# Altium PCB PCB1.PcbDoc
Units mm, origin at the board's own origin, x right, y up, seen from the top; angles counter-clockwise.
Board outline 92.71 x 59.95 mm, 4 copper layers (Top Layer, Inner Layer Top, Inner Layer Bottom, Bottom Layer), stack 1.571 mm thick; 48 components, 33 nets, 202 pads, 802 vias.
Unrouted connection lines stored in the file: 2.
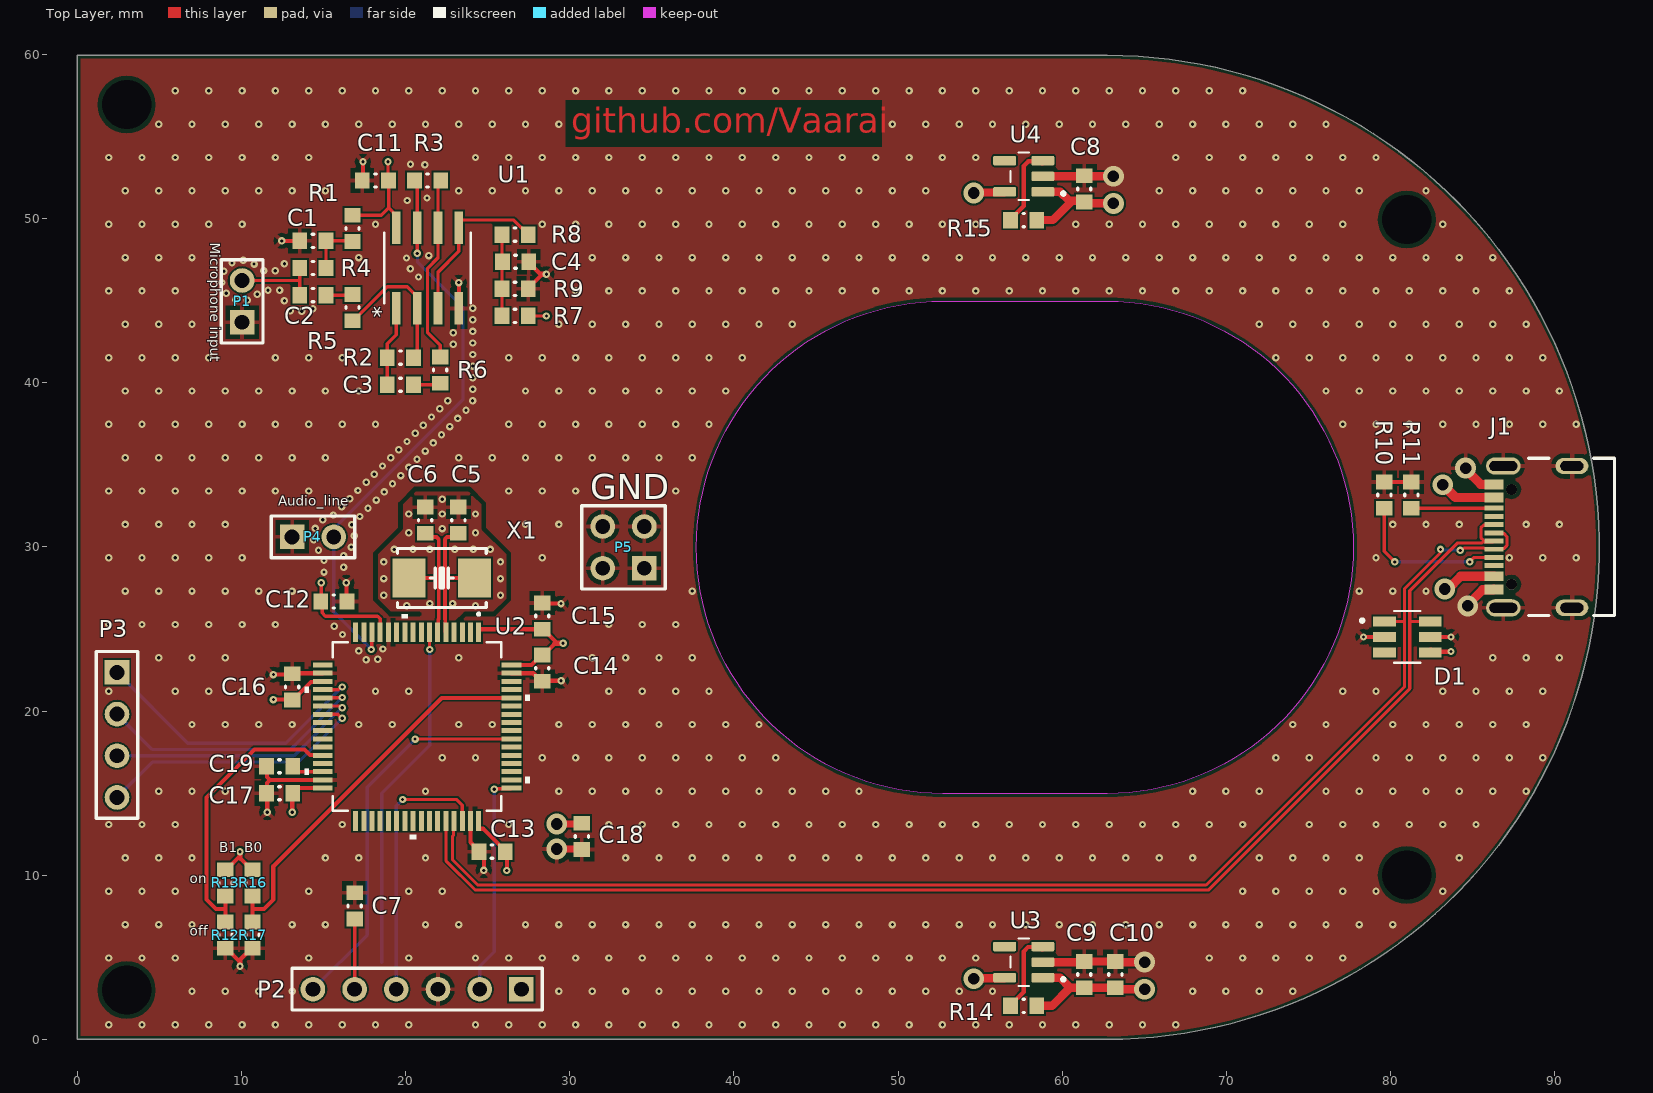
[diagram p0: Top Layer view]
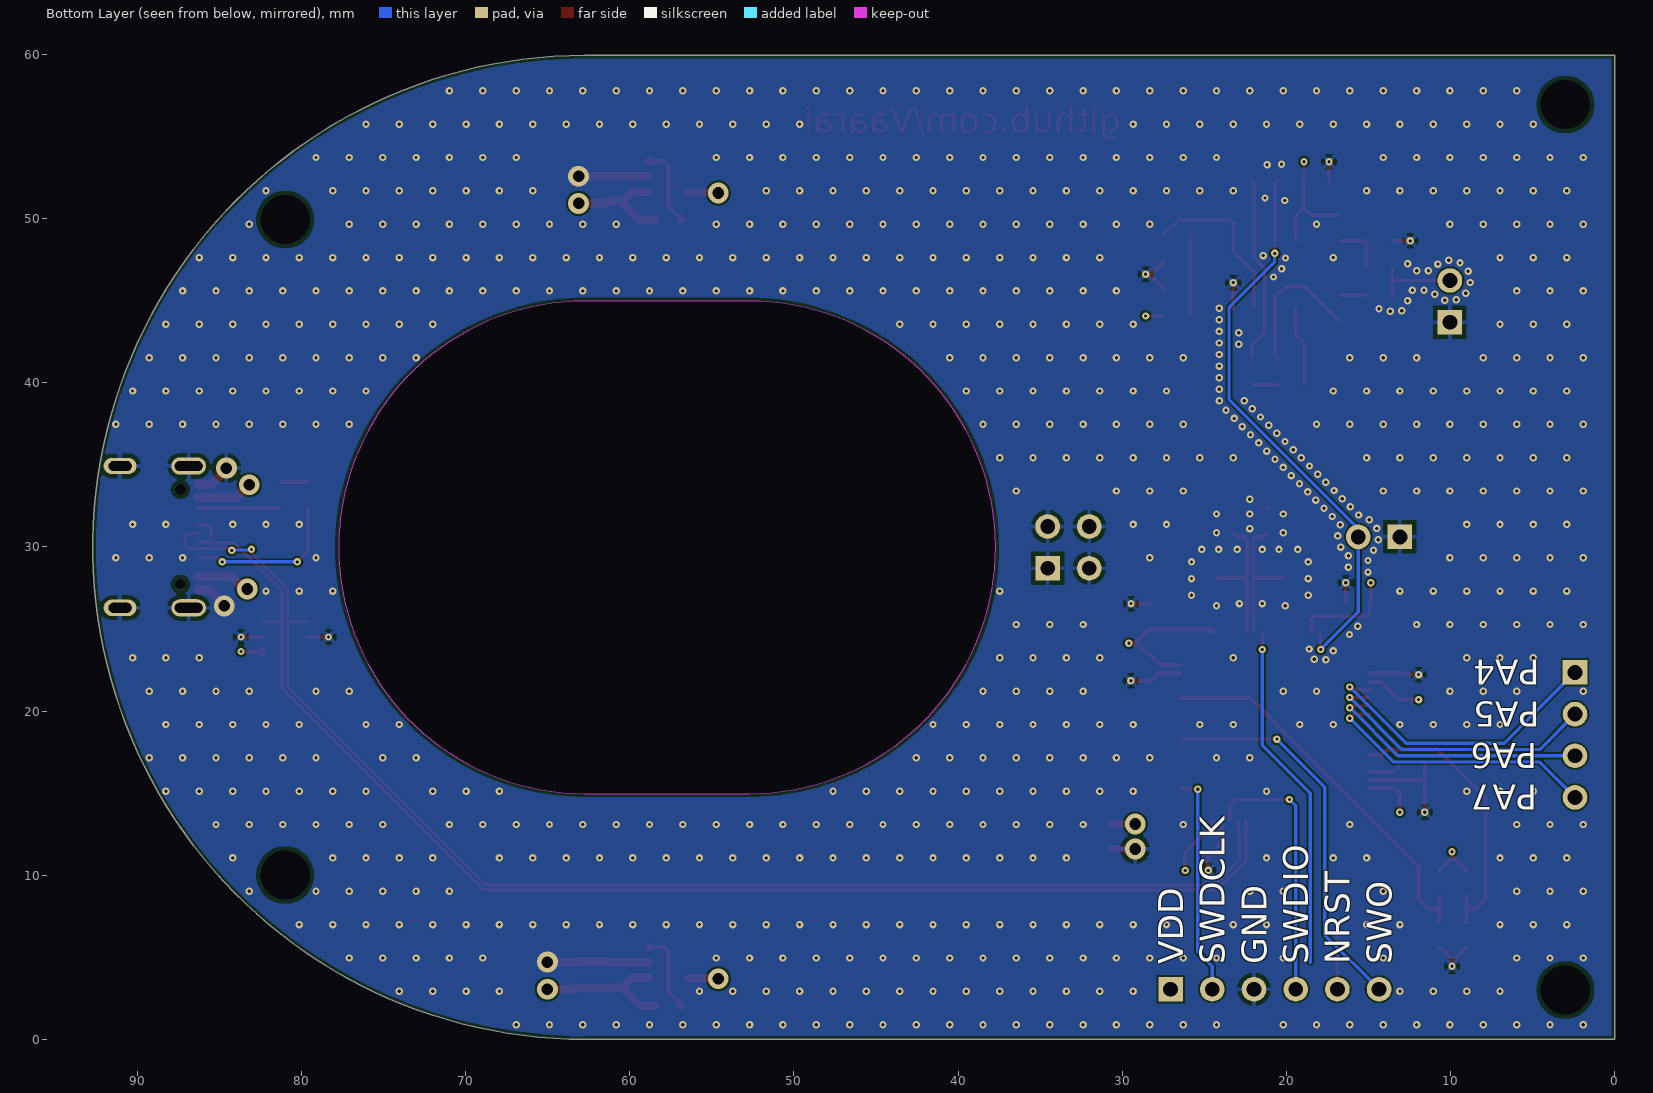
[diagram p1: Bottom Layer view, seen from below]
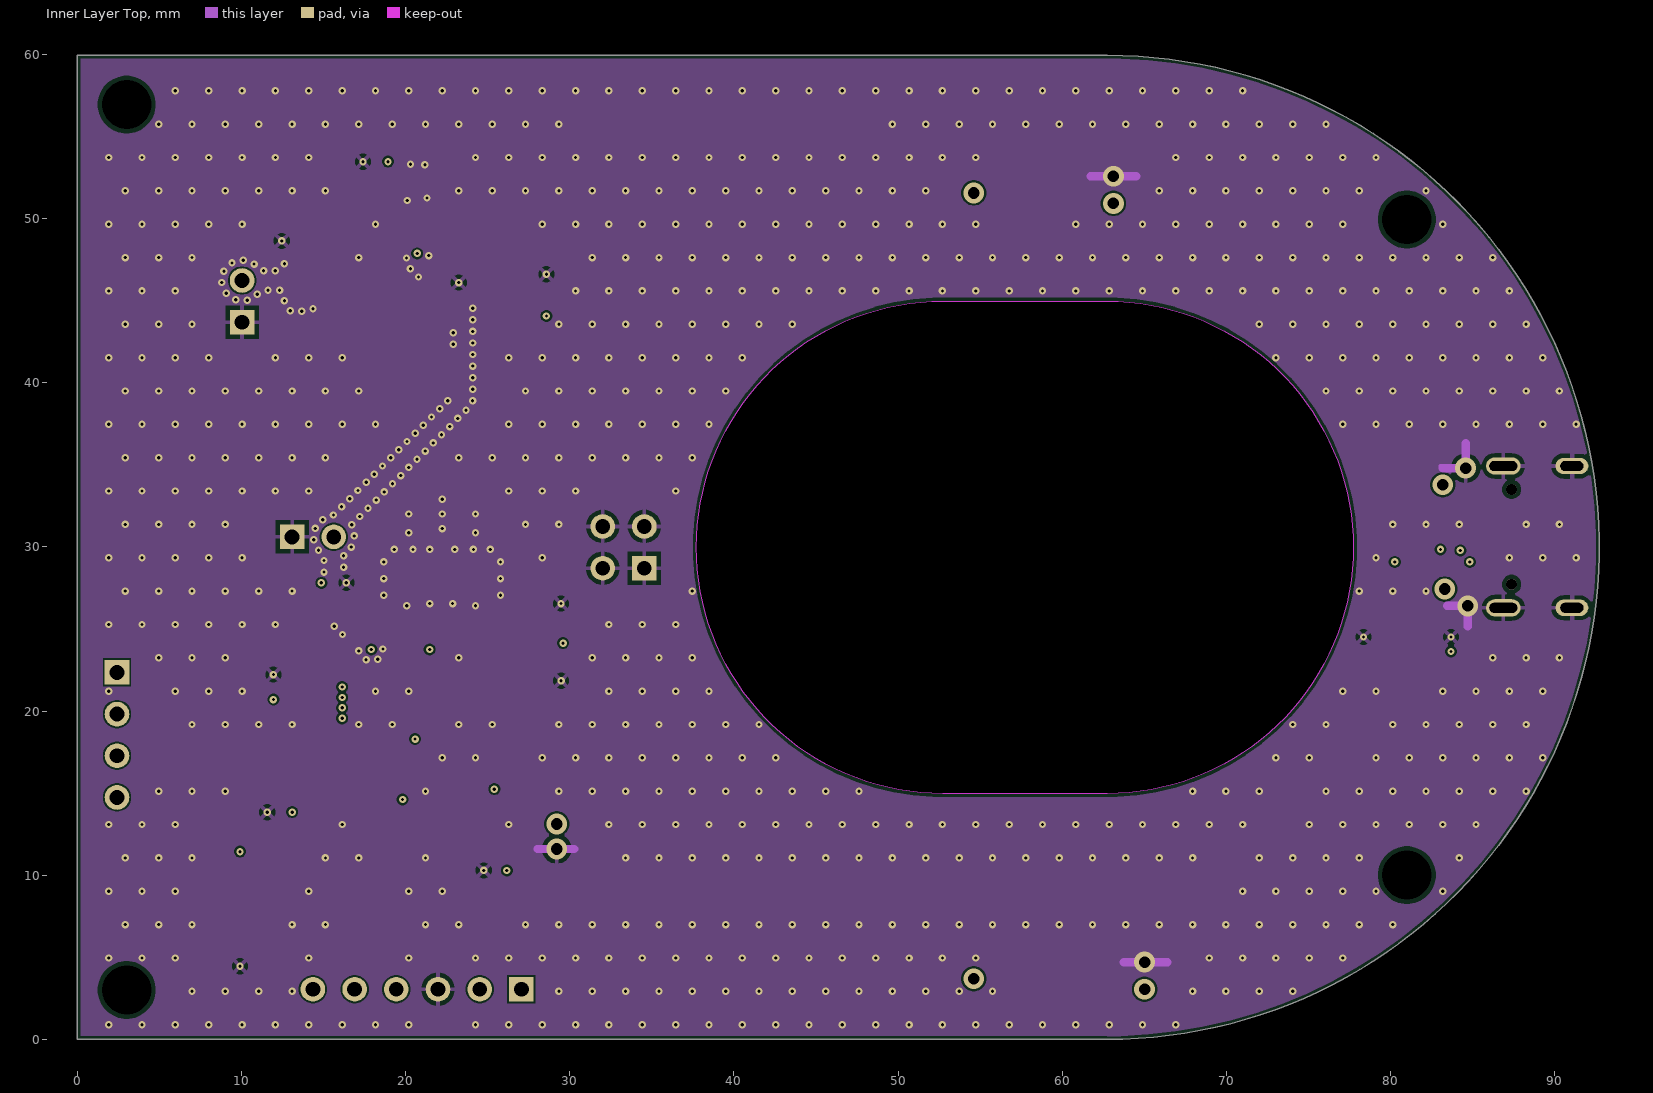
[diagram p2: Inner Layer Top]
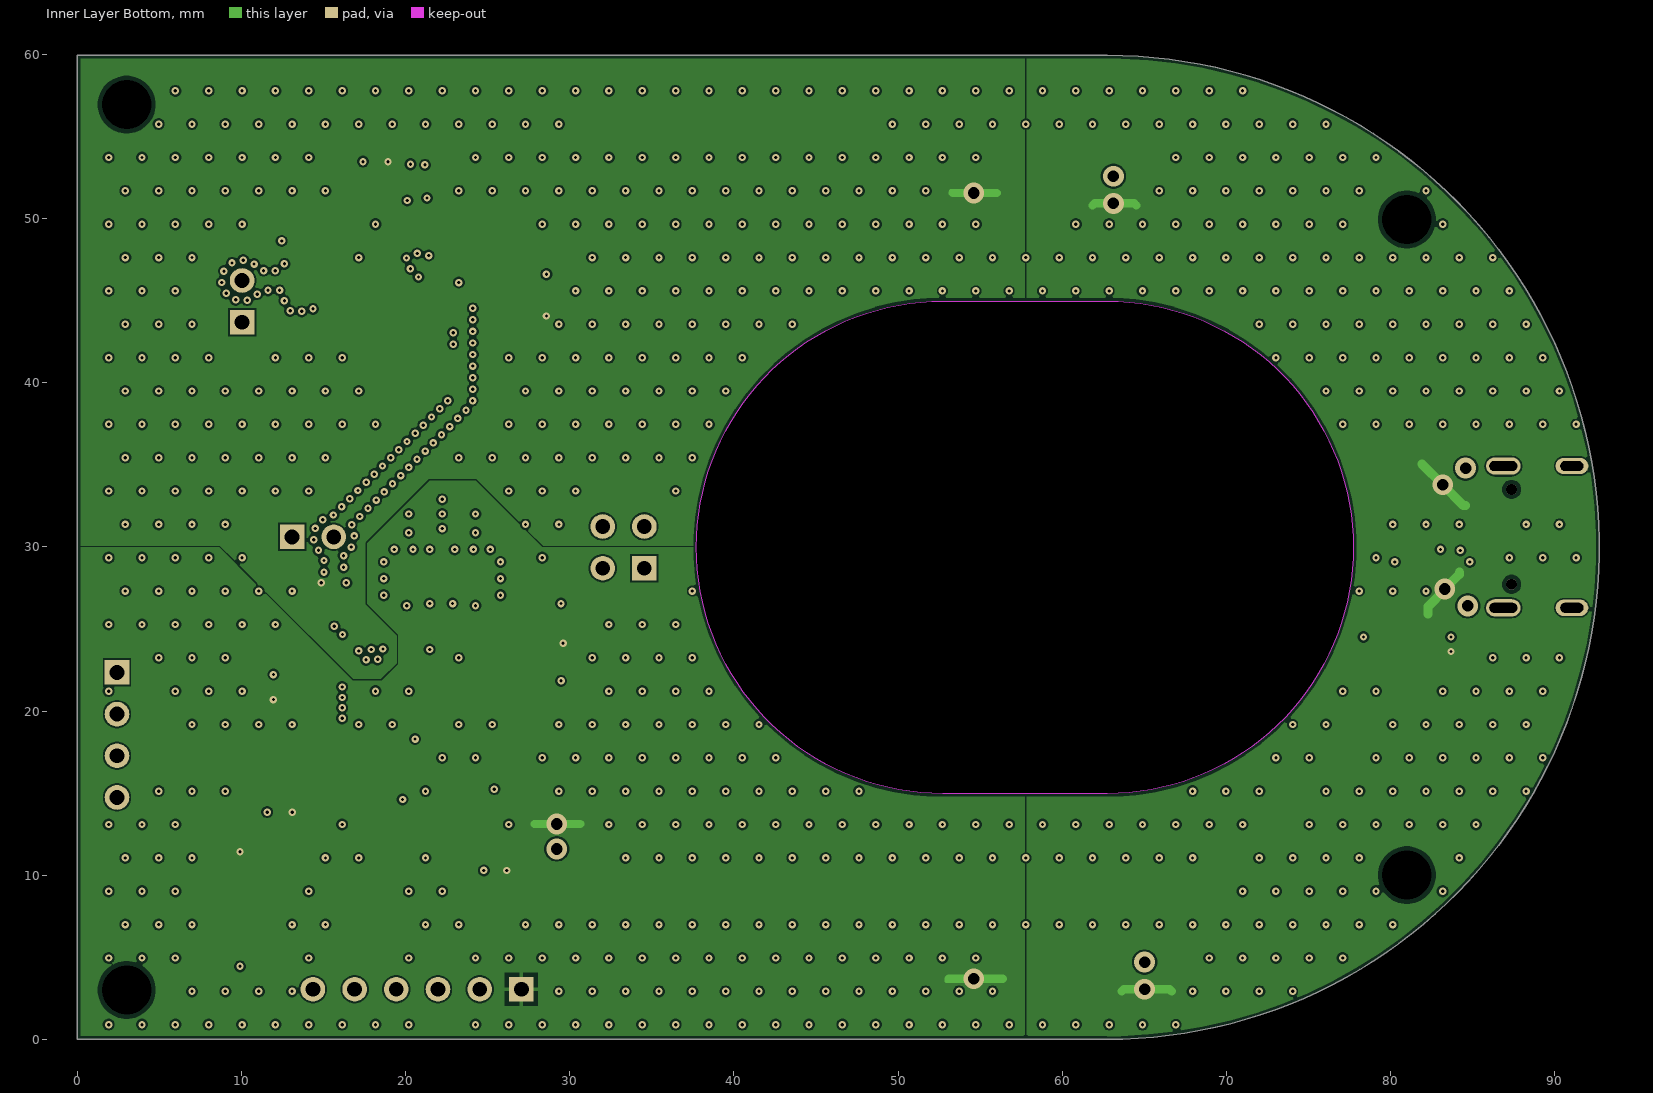
[diagram p3: Inner Layer Bottom]

## Layer stack, top to bottom
Top Solder: solder mask 0.0127, Solder Resist, Dk 3.8
Top Layer: signal copper 0.0356
Prepreg Top: prepreg 0.2, PP-022, Dk 4.6
Inner Layer Top: signal copper 0.0175
Core: dielectric 1.065, FR-4, Dk 4.6
Inner Layer Bottom: signal copper 0.0175
Prepreg Bottom: prepreg 0.2, PP-022, Dk 4.6
Bottom Layer: signal copper 0.0356
Bottom Solder: solder mask 0.0127, Solder Resist, Dk 3.8

## Board outline
0,0.001 0,59.945 62.738,59.945 cw(c62.738,29.97) 62.738,-0.006
cut-out: 52.716,14.97 cw(c52.716,29.97) 52.716,44.97 62.738,44.97 cw(c62.738,29.97) 62.738,14.97

## Design rules (kind name [scope] priority, off if disabled: settings)
BoardOutlineClearance [All] p1: gap=0.2 ignorepadtopadclearanceinfootprint=FALSE
Clearance Clearance_1 [InNamedPolygon('GND_TOP') vs InNamedPolygon('GND_OSC')] p1: gap=0.254 ignorepadtopadclearanceinfootprint=FALSE except(0: Arc-Hole Track-Hole SMDPad-Hole THPad-Hole Via-Hole Fill-Hole Poly-Hole Region-Hole Text-Hole)
Clearance [All] p2: gap=0.102 ignorepadtopadclearanceinfootprint=FALSE except(0.127: Arc-Via Track-Via SMDPad-Via THPad-Via Via-Via Via-Fill Via-Poly Via-Region Via-Text; 0.25: Arc-Hole Track-Hole SMDPad-Hole THPad-Hole Via-Hole Fill-Hole Poly-Hole Region-Hole Text-Hole)
ComponentClearance [All] p1: gap=0.102 collisioncheckmode=3 verticalgap=0.102 showdistances=TRUE
DiffPairsRouting "90 Ohms" [All] p1: maxlimit=0.127 minlimit=0.127 mostfreqgap=0.127 toplayer_minwidth=0.189 toplayer_maxwidth=0.189 toplayer_prefwidth=0.189 bottomlayer_minwidth=0.189 bottomlayer_maxwidth=0.189 bottomlayer_prefwidth=0.189 impedanceprofiledriven=TRUE impedanceprofileid={EE4570CF-732E-4289-AE26-F3C0BA716A59} impedanceprofilevalue=90.000000 maxuncoupledlength=12.7
DiffPairsRouting OSC [All] p2: maxlimit=0.254 minlimit=0.152 mostfreqgap=0.254 toplayer_maxgap=0.152 toplayer_prefgap=0.152 toplayer_minwidth=0.229 toplayer_maxwidth=0.229 toplayer_prefwidth=0.229 midlayer1_mingap=0.254 midlayer1_minwidth=0.381 midlayer1_maxwidth=0.381 midlayer1_prefwidth=0.381 midlayer2_mingap=0.254 midlayer2_minwidth=0.381 midlayer2_maxwidth=0.381 midlayer2_prefwidth=0.381 bottomlayer_maxgap=0.152 bottomlayer_prefgap=0.152 bottomlayer_minwidth=0.229 bottomlayer_maxwidth=0.229 bottomlayer_prefwidth=0.229 maxuncoupledlength=12.7
DiffPairsRouting [All] p3: maxlimit=0.102 minlimit=0.102 mostfreqgap=0.102 toplayer_minwidth=0.102 toplayer_maxwidth=1816.048 toplayer_prefwidth=0.102 midlayer1_minwidth=0.102 midlayer1_maxwidth=1816.048 midlayer1_prefwidth=0.102 midlayer2_minwidth=0.102 midlayer2_maxwidth=1816.048 midlayer2_prefwidth=0.102 bottomlayer_minwidth=0.102 bottomlayer_maxwidth=1816.048 bottomlayer_prefwidth=0.102 maxuncoupledlength=12.7
Height [All] p1: minheight=0 maxheight=1816.048 prefheight=12.7
HoleSize [All] p1: absolutevalues=TRUE maxlimit=6.3 minlimit=0.2 maxpercent=80.000 minpercent=20.000
HoleToHoleClearance [All] p1: gap=0.25 allowstackedmicrovias=FALSE
MinimumAnnularRing [All] p1: minimumring=0.076
MinimumSolderMaskSliver [All] p1: minsoldermaskwidth=0
PlaneClearance [All] p1: clearance=0.102
PlaneConnect PlaneConnectPowerPads [InPadClass('PowerPads')] p1: planeconnectstyle=Relief reliefexpansion=0.508 reliefentries=4 reliefconductorwidth=0.254 reliefairgap=0.254
PlaneConnect [All] p2: planeconnectstyle=Relief reliefexpansion=0.3 reliefentries=4 reliefconductorwidth=0.102 reliefairgap=0.102
PolygonConnect PolygonConnectPowerPads [All vs (InPadClass('PowerPads'))] p1: connectstyle=Relief reliefconductorwidth=0.254 reliefentries=4 polygonreliefangle="90 Angle" airgapwidth=0.254
PolygonConnect [All] p2: thpad.connectstyle=Relief thpad.reliefconductorwidth=0.102 thpad.reliefentries=4 thpad.polygonreliefangle="90 Angle" thpad.airgapwidth=0.102 smdpad.connectstyle=Relief smdpad.reliefconductorwidth=0.102 smdpad.reliefentries=4 smdpad.polygonreliefangle="90 Angle" smdpad.airgapwidth=0.102 via.connectstyle=Direct via.reliefconductorwidth=0.127 via.reliefentries=4 via.polygonreliefangle="45 Angle" via.airgapwidth=0.127
RoutingVias [All] p1: holewidth=0.2 width=0.45 viastyle="Through Hole" minholewidth=0.2 minwidth=0.45 maxholewidth=6.3 maxwidth=6.55
SilkToSilkClearance [All] p1: silktosilkclearance=0
SilkToSolderMaskClearance [IsPad] p1: minsilkscreentomaskgap=0.102 clearancetoexposedcopper=TRUE
SolderMaskExpansion [All] p1: expansion=0.075 istentingtop=FALSE
SolderMaskExpansion SolderMaskExpansion_vias [IsVia] p2: expansion=0.075 istentingtop=TRUE
Width GND [InNet('GND')] p1: maxlimit=0.762 minlimit=0.203 preferedwidth=0.254 midlayer1_minwidth=0.254 midlayer1_maxwidth=0.254 midlayer2_minwidth=0.254 midlayer2_maxwidth=0.254 minimp=50.000000 maximp=50.000000 favimp=50.000000
Width VDD [InNet('VDD')] p2: maxlimit=0.762 minlimit=0.203 preferedwidth=0.254 midlayer1_minwidth=0.254 midlayer1_maxwidth=0.254 midlayer2_minwidth=0.254 midlayer2_maxwidth=0.254 minimp=50.000000 maximp=50.000000 favimp=50.000000
Width [All] p3: maxlimit=1816.048 minlimit=0.102 preferedwidth=0.203 midlayer1_prefwidth=0.102 midlayer2_prefwidth=0.102 minimp=50.000000 maximp=50.000000 favimp=50.000000
20 further rules are at their usual default settings.

## Classes and differential pairs
net class OSC: OSC_IN OSC_OUT
net class "90 Ohms": USB_N USB_P
component class Sheet1: C1 C2 C3 C4 C5 C6 C7 C8 C9 C10 C11 C12 C13 C14 C15 C16 C17 C18 C19 D1 J1 P1 P2 R1 R2 R3 R4 R5 R6 R7 R8 R9 R10 R11 R17 U2 U3 U4 X1
differential pair USB: +USB_P -USB_N

## Components (designator, comment, footprint, x,y, rotation, side; value= is the part's Value field where it differs from the comment)
C1 "4.7uF" 0603C 14.351,48.642 r180 top
C2 "1uF" 0603C 14.351,45.34 r0 top
C3 "1uF" 0603C 19.685,39.879 r0 top
C4 "4.7uF" 0603C 26.695,47.372 r0 top
C5 "20pF" 0603C 23.217,31.624 r90 top
C6 "20pF" 0603C 21.185,31.624 r90 top
C7 "100nF" 0603C 16.891,8.129 r90 top
C8 "100nF" 0603C 61.341,51.817 r90 top
C9 "100nF" 0603C 61.341,3.938 r90 top
C10 "4.7uF" 0603C 63.246,3.938 r90 top
C11 "100nF" 0603C 18.161,52.325 r180 top
C12 "100nF" 0603C 15.621,26.671 r0 top
C13 "100nF" 0603C 25.273,11.431 r180 top
C14 "100nF" 0603C 28.321,22.607 r270 top
C15 "100nF" 0603C 28.321,25.782 r90 top
C16 "100nF" 0603C 13.081,21.464 r90 top
C17 "100nF" 0603C 12.319,14.987 r180 top
C18 "4.7uF" 0603C 30.734,12.358 r270 top
C19 "2.2uF" 0603C 12.319,16.638 r180 top
D1 "ESDA6V1BC6" IC_IC-DP_SOT23-6L 81.026,24.512 r0 top
J1 "USB4105-GF-A" GCT_USB4105-GF-A 91.059,30.606 r90 top
P1 "Microphone input" HDR1X2 10.033,43.689 r90 top
P2 "JTAG" HDR1X6 27.051,3.049 r180 top
P3 "GPIO" HDR1X4 2.413,22.353 r270 top
P4 "Audio_line" HDR1X2 13.081,30.608 r0 top
P5 "GND" HDR2X2 34.544,28.703 r90 top
R1 "1K" 0603R 16.764,49.404 r90 top
R2 "100K" 0603R 19.685,41.53 r180 top
R3 "100K" 0603R 21.336,52.325 r180 top
R4 "2.2K" 0603R 14.351,46.991 r0 top
R5 "10K" 0603R 16.764,44.578 r270 top
R6 "10K" 0603R 22.098,40.768 r90 top
R7 "100K" 0603R 26.67,44.07 r0 top
R8 "33K" 0603R 26.67,49.023 r0 top
R9 "100K" 0603R 26.67,45.721 r180 top
R10 "5.1K" 0603R 79.629,33.148 r270 top value=100K
R11 "5.1K" 0603R 81.28,33.148 r90 top value=100K
R12 "10K" 0603R 9.017,6.351 r90 top
R13 "10K" 0603R 9.017,9.526 r270 top
R14 "5.1K" 0603R 57.658,2.033 r180 top value=100K
R15 "5.1K" 0603R 57.658,49.912 r180 top value=100K
R16 "10K" 0603R 10.669,9.526 r270 top
R17 "10K" 0603R 10.669,6.351 r90 top
U1 "TS972IDT" SO-8_STM 21.336,46.991 r90 top
U2 "STM32F446RET6" LQFP64-10x10mm 20.701,19.051 r270 top
U3 "MIC5504-3.3YM5_TR" SOT95P280X145-5N 57.658,4.7 r180 top
U4 "MIC5504-3.3YM5_TR" SOT95P280X145-5N 57.658,52.579 r180 top
X1 "NX5032GA" 2-SMD-5X3 22.201,28.103 r180 top

## Footprints (in the part's own frame and the unit in brackets; to place one, negate y for a bottom-side part, rotate by r counter-clockwise, add the part's x,y. Pads: shape width x height; smd on the part's side, far side on the other; paste and mask are expansions set on the pad)
2-SMD-5X3 [mm]
  rect 2x2.4 smd: 1(-2,0) 2(2,0)
  silkscreen extent -2.7,-1.8 2.7,1.8
0603C [mm] "Chip Capacitor, Body 1.6x0.8mm, Height 1.0mm, IPC Medium Density"
  rect 0.9x1 smd: 1(-0.8,0) 2(0.8,0)
  silkscreen extent -0.05,-0.4 0.05,0.4, body extent -0.87,-0.48 0.88,0.47, height 1
0603R [mm] "Chip Resistor, Body 1.6x0.8mm, IPC Medium Density"
  rect 0.9x1 smd: 1(-0.8,0) 2(0.8,0)
  silkscreen extent -0.05,-0.4 0.05,0.4, body extent -0.85,-0.47 0.85,0.47, height 0.6
GCT_USB4105-GF-A [mm]
  rect 0.6x1.15 smd: A1_B12(-3.2,4.755) A4_B9(-2.4,4.755) B1_A12(3.2,4.755) B4_A9(2.4,4.755)
  rect 0.3x1.15 smd: A5(-1.25,4.755) A6(-0.25,4.755) A7(0.25,4.755) A8(1.25,4.755) B5(1.75,4.755) B6(0.75,4.755) B7(-0.75,4.755) B8(-1.75,4.755)
  oval 1.05x2.1 hole 0.6 slot 1.7 at 90 deg: S1(-4.32,4.18) S4(4.32,4.18)
  oval 1x2 hole 0.6 slot 1.4 at 90 deg: S2(-4.32,0) S3(4.32,0)
  round 0.65 hole 0.65 unplated: ""(-2.89,3.68) ""(2.89,3.68)
  silkscreen extent -4.79,-2.6 4.79,2.65, body extent -4.79,-3.86 4.79,3.86, height 3.31
HDR1X2 [mm] "Connector; Header; 2 Position"
  rect 1.5x1.5 hole 0.9: 1(0,0)
  round 1.5 hole 0.9: 2(2.54,0)
  silkscreen extent -1.27,-1.27 3.81,1.27
HDR1X4 [mm] "Connector; Header; 4 Position"
  rect 1.5x1.5 hole 0.9: 1(0,0)
  round 1.5 hole 0.9: 2(2.54,0) 3(5.08,0) 4(7.62,0)
  silkscreen extent -1.27,-1.27 8.89,1.27
HDR1X6 [mm] "Connector; Header; 6 Position"
  rect 1.5x1.5 hole 0.9: 1(0,0)
  round 1.5 hole 0.9: 2(2.54,0) 3(5.08,0) 4(7.62,0) 5(10.16,0) 6(12.7,0)
  silkscreen extent -1.27,-1.27 13.97,1.27
HDR2X2 [mm] "Connector; Header; 2x2 Position"
  rect 1.5x1.5 hole 0.9: 1(0,0)
  round 1.5 hole 0.9: 2(0,2.54) 3(2.54,0) 4(2.54,2.54)
  silkscreen extent -1.27,-1.27 3.81,3.81
IC_IC-DP_SOT23-6L [mm]
  rect 1.375x0.6 smd: 1(-1.389,0.95) 2(-1.389,0) 3(-1.389,-0.95) 4(1.389,-0.95) 5(1.389,0) 6(1.389,0.95)
  silkscreen extent -2.85,-1.57 0.8,1.57
LQFP64-10x10mm [mil]
  rect 47x12 smd paste+0 mask+0: 1(-226.38,147.64) 2(-226.38,127.95) 3(-226.38,108.27) 4(-226.38,88.58) 5(-226.38,68.9) 6(-226.38,49.21) 7(-226.38,29.53) 8(-226.38,9.84) 9(-226.38,-9.84) 10(-226.38,-29.53) 11(-226.38,-49.21) 12(-226.38,-68.9) 13(-226.38,-88.58) 14(-226.38,-108.27) 15(-226.38,-127.95) 16(-226.38,-147.64) 33(226.38,-147.64) 34(226.38,-127.95) 35(226.38,-108.27) 36(226.38,-88.58) 37(226.38,-68.9) 38(226.38,-49.21) 39(226.38,-29.53) 40(226.38,-9.84) 41(226.38,9.84) 42(226.38,29.53) 43(226.38,49.21) 44(226.38,68.9) 45(226.38,88.58) 46(226.38,108.27) 47(226.38,127.95) 48(226.38,147.64)
  rect 12x47 smd paste+0 mask+0: 17(-147.64,-226.38) 18(-127.95,-226.38) 19(-108.27,-226.38) 20(-88.58,-226.38) 21(-68.9,-226.38) 22(-49.21,-226.38) 23(-29.53,-226.38) 24(-9.84,-226.38) 25(9.84,-226.38) 26(29.53,-226.38) 27(49.21,-226.38) 28(68.9,-226.38) 29(88.58,-226.38) 30(108.27,-226.38) 31(127.95,-226.38) 32(147.64,-226.38) 49(147.64,226.38) 50(127.95,226.38) 51(108.27,226.38) 52(88.58,226.38) 53(68.9,226.38) 54(49.21,226.38) 55(29.53,226.38) 56(9.84,226.38) 57(-9.84,226.38) 58(-29.53,226.38) 59(-49.21,226.38) 60(-68.9,226.38) 61(-88.58,226.38) 62(-108.27,226.38) 63(-127.95,226.38) 64(-147.64,226.38)
  silkscreen extent -273,-270 270,270, body extent -236,-236 236,236, height 63
SO-8_STM [mil]
  rect 78x21 smd paste+0 mask+0: 1(-97,75) 2(-97,25) 3(-97,-25) 4(-97,-75) 5(97,-75) 6(97,-25) 7(97,25) 8(97,75)
  silkscreen extent -84,-104 84,104, body extent -122,-99 122,99, height 69
SOT95P280X145-5N [mm]
  rrect25% 1.39x0.58 smd: 1(-1.165,0.95) 2(-1.165,0) 3(-1.165,-0.95) 4(1.165,-0.95) 5(1.165,0.95)
  silkscreen extent -2.51,-1.45 0.8,1.45, body extent 15,-1.1 17.9,0, height 25.4

## Part data
C1 C2 C3 C4 C5 C6 C7 C8 C9 C10 C11 C12 C13 C14 C15 C16 C17 C18 C19: library part CAP, "Capacitor"
D1: "4-line ESD protection", Manuf_1=STM, Manuf_Part_1=ESDA5V3L, Distrib=ST, ECCN_US/EU=EAR99/NEC, Order=ESDA5V3L, Ordered by=STM, Provided=ST, Ref St=9179034
J1: "USB-C (USB TYPE-C) USB 2.0 Receptacle Connector 24 (16+8 Dummy) Position Surface Mount, Right Angle; Through Hole", Package=None, Availability=Warning, Check_prices=https://www.snapeda.com/parts/USB4105-GF-A/Global%20Connector%20Technology/view-part/4423780/?ref=eda, MF=GCT, MP=USB4105-GF-A, Price=None, Purchase-URL=https://pricing.snapeda.com/search/part/USB4105-GF-A/?ref=eda, SnapEDA_Link=https://www.snapeda.com/parts/USB4105-GF-A/Global%20Connector%20Technology/view-part/4423780/?ref=snap
P1 P4: library part "Header 2", "Header, 2-Pin", LatestRevisionDate=17-Jul-2002, LatestRevisionNote="Re-released for DXP Platform.", Publisher="Altium Limited"
P2: library part "Header 6", "Header, 6-Pin", LatestRevisionDate=17-Jul-2002, LatestRevisionNote="Re-released for DXP Platform.", Publisher="Altium Limited"
P3: library part "Header 4", "Header, 4-Pin", LatestRevisionDate=17-Jul-2002, LatestRevisionNote="Re-released for DXP Platform.", Publisher="Altium Limited"
P5: library part "Header 2X2", "Header, 2-Pin, Dual row", LatestRevisionDate=17-Jul-2002, LatestRevisionNote="Re-released for DXP Platform.", Publisher="Altium Limited"
R1 R2 R3 R4 R5 R6 R7 R8 R9 R10 R11 R12 R13 R14 R15 R16 R17: library part Res1, "Resistor", Published=8-Jun-2000, Publisher="Altium Limited", Revision="July-2002: Re-released for DXP Platform."
U1 U2: "No Description Available", Mfr_Name=STMicroelectronics, Copyright="Copyright (C) 2021 Ultra Librarian. All rights reserved.", RefDes=RefDes, Type=DEV
  U1: Manufacturer_Part_Number=TS972IDT
  U2: Manufacturer_Part_Number=STM32F446RET6
U3 U4: "Linear Voltage Regulator IC 1 Output 300mA SOT-23-5", Package="SOT-23 Microchip", Availability=Unavailable, Check_prices=https://www.snapeda.com/parts/MIC5504-3.3YM5%20TR/Microchip/view-part/423262/?ref=eda, MF=Microchip, MP="MIC5504-3.3YM5 TR", Price=None, SnapEDA_Link=https://www.snapeda.com/parts/MIC5504-3.3YM5%20TR/Microchip/view-part/423262/?ref=snap
X1: "16MHz Â±50ppm Crystal 8pF 120 Ohms 2-SMD, No Lead", Package="SMD-2 NDK America,", Availability=Unavailable, MF="NDK America,", MP=NX5032GA, Price=None, SnapEDA_Link=https://www.snapeda.com/parts/NX5032GA/NDK%20America%2C%20Inc./view-part/511653/?ref=snap

## Free pads (board coordinates)
  round 0 hole 3 unplated: 3(3,3) 3(3,56.945) 3(81,10) 3(81,49.945)

## Via types
v1: diameter 0.45/0.45/0.45/0.45 (per signal layer), hole 0.2, Top Layer to Bottom Layer, tented both sides, 740 vias
v2: diameter 0.45, hole 0.2, Top Layer to Bottom Layer, tented both sides, 50 vias
v3: diameter 1.27/1.27/1.27/1.27 (per signal layer), hole 0.711, Top Layer to Bottom Layer, 10 vias
v4: diameter 1.27, hole 0.711, Top Layer to Bottom Layer, 2 vias

## Nets (pads, with @x,y where several pads share a name; then routed paths per layer and width w, separated by ;. In a path a pad name is that pad's centre, name@x,y a point inside that pad or via, vN(x,y) a via of type N, cw(c..) or ccw(c..) an arc to the next point about the centre after c; other vN are vias at no path point)
AOP1_+: R8.2 U1.3 U1.5 | length 10.4
  Top Layer w0.203: U1.3 21.971,46.737 23.241,48.007 U1.5 23.241,49.747 23.406,49.912 26.581,49.912 27.072,49.421 27.122,49.421 27.47,49.073 R8.2
AOP1_-: R2.1 R5.2 U1.2 | length 8.9
  Top Layer w0.203: R5.2 16.814,43.778 18.884,45.848 20.104,45.848 20.701,45.251 U1.2 20.701,41.746 R2.1
AOP1_OUT: C3.1 R2.2 U1.1 | length 4.9
  Top Layer w0.203: C3.1 18.885,42.378 19.431,42.924 U1.1
AOP2_-: R3.1 R6.2 U1.6 | length 11.4
  Top Layer w0.203: R6.2 22.098,42.292 21.336,43.054 21.336,46.991 21.971,47.626 U1.6 21.971,52.16 R3.1
AOP2_OUT: P4.2 R3.2 U1.7 U2.14 | length 35
  Top Layer w0.203: v2(17.907,23.75) 17.929,23.772 U2.14@17.929,24.779 ; R3.2 20.701,52.16 U1.7 v2(20.701,47.88)
  Bottom Layer w0.203: v2(17.907,23.75) 15.621,26.036 15.621,31.116 23.495,38.99 23.495,44.578 20.723,47.35 20.723,47.858 v2(20.701,47.88)
AVDD: C11.1 C12.1 R1.2 R7.2 U1.8 U2.13 U4.5 | length 19.7
  Top Layer w0.203: v1(14.865,27.808) 14.865,26.715 C12.1 14.91,26.582 14.91,25.985 15.113,25.782 18.288,25.782 18.451,25.619 U2.13 ; R1.2 18.516,50.204 18.961,50.648 ; v1(18.923,53.468) 18.923,52.363 C11.1 18.961,50.648 ; U1.8@19.266,48.642 19.431,48.807 U1.8 19.431,50.178 18.961,50.648 ; R7.2 v1(28.575,44.07) ; v3(54.61,51.563) v3@54.643,51.596 ; U4.5@56.46,51.596 U4.5
  Top Layer w0.508: v3@54.643,51.596 U4.5@56.46,51.596
  Inner Layer Bottom w0.203: 53.213,51.69 53.34,51.563
  Inner Layer Bottom w0.508: 53.34,51.563 v3(54.61,51.563) 56.007,51.563
BOOT0: R16.2 R17.2 U2.60 | length 23.9
  Top Layer w0.254: R17.2 10.669,7.938 ; R16.2 10.669,7.938 ; U2.60 22.197,20.801 11.938,10.542 11.938,8.51 11.367,7.938 10.669,7.938
BOOT1: R12.2 R13.2 U2.28 | length 17.6
  Top Layer w0.254: R12.2 9.017,7.938 ; R13.2 9.017,7.938 ; U2.28 14.926,17.326 14.171,17.326 13.843,17.654 10.795,17.654 7.874,14.733 7.874,8.51 8.446,7.938 9.017,7.938
CC1: J1.A5 R10.2 | length 9.7
  Top Layer w0.203: R10.2 79.629,29.719 v2(80.264,29.084) ; v2(84.836,29.084) 85.108,29.356 J1.A5
  Bottom Layer w0.203: v2(80.264,29.084) v2(84.836,29.084)
CC2: J1.B5 R11.1 | length 5
  Top Layer w0.203: R11.1 R11.1@81.288,32.356 ; R11.1@81.28,32.356 R11.1@81.288,32.356 ; J1.B5 R11.1@81.288,32.356
GND: C1.2 C4.2 C5.2 C6.2 C7.2 C8.2 C9.2 C10.2 C11.2 C12.2 C13.2 C14.2 C15.2 C16.2 C17.2 C18.2 C19.2 D1.2 D1.5 J1.A1_B12 J1.B1_A12 J1.S1 J1.S2 J1.S3 J1.S4 P1.1 P2.3 P4.1 P5.1 P5.2 P5.3 P5.4 R9.1 R10.1 R11.2 R12.1 R17.1 U1.4 U2.12 U2.18 U2.31 U2.47 U2.63 U3.2 U4.2 | length 61.7
  Top Layer w0.254: R12.1 9.067,5.551 9.868,4.749 9.868,4.483 v2(9.906,4.446) 9.944,4.483 9.944,4.875 10.619,5.551 R17.1 ; C19.2 11.557,16.6 11.557,15.98 11.736,15.801 ; v2(11.563,13.838) 11.563,14.943 C17.2 11.557,15.025 11.557,15.622 11.736,15.801 ; v2(11.944,22.22) C16.2@13.037,22.22 ; v2(12.446,48.642) C1.2 ; C16.2 13.118,22.301 U2.18 ; U2.31 11.736,15.801 ; v2(16.389,27.808) 16.389,26.653 16.411,26.631 16.411,26.661 C12.2 C12.2@16.471,26.621 ; C11.2 17.399,52.363 v2(17.399,53.468) ; C6.2@21.147,32.386 C6.2 ; U1.4 v2(23.241,46.102) ; U2.47 23.951,12.003 24.473,11.481 C13.2 ; v2(24.765,10.288) C13.2@24.765,11.139 ; U2.63 27.777,22.301 C14.2@28.321,21.757 ; R9.1 27.47,45.771 28.272,46.572 28.537,46.572 v2(28.575,46.61) 28.537,46.647 28.17,46.647 27.495,47.322 C4.2 ; C15.2@28.309,26.544 v2(29.464,26.544) ; C14.2 28.353,21.839 v2(29.47,21.839) ; C18.2@30.696,11.596 C18.2 ; v2(78.359,24.512) D1.2 ; R10.1 R11.2 ; D1.5 v2(83.693,24.512) ; v4@84.582,34.716 v4(84.582,34.799) ; J1.A1_B12@86.291,27.419 J1.A1_B12
  Top Layer w0.406: v4(29.21,11.596) C18.2@30.696,11.596
  Top Layer w0.508: U3.2 61.303,4.7 C9.2 C10.2 ; U4.2 61.303,52.579 C8.2 61.379,52.579 v3(63.119,52.579) ; C10.2@63.284,4.7 v3(65.024,4.7)
  Top Layer w0.559: v4@84.582,34.716 85.493,33.806 J1.B1_A12 ; v3(84.71,26.404) 84.71,26.479 85.616,27.385 86.256,27.385 J1.A1_B12@86.291,27.419
  Inner Layer Top w0.254: 27.94,11.685 28.029,11.596 ; 30.264,11.596 30.353,11.685 ; 83.058,34.926 83.185,34.799 ; 83.439,26.417 83.451,26.404
  Inner Layer Top w0.508: 28.029,11.596 v4(29.21,11.596) 30.264,11.596 ; 61.722,52.579 v3(63.119,52.579) 64.516,52.579 ; 63.754,4.7 v3(65.024,4.7) 66.421,4.7 ; 83.185,34.799 v4(84.582,34.799) 84.582,36.323 ; 83.451,26.404 v3(84.71,26.404) 84.71,25.148
  other v1: 1.905,0.89 3.937,0.89 5.969,0.89 8.001,0.89 10.033,0.89 12.065,0.89 14.097,0.89 16.129,0.89 18.161,0.89 20.193,0.89 24.257,0.89 26.289,0.89 28.321,0.89 30.353,0.89 32.385,0.89 34.417,0.89 36.449,0.89 38.481,0.89 40.513,0.89 42.545,0.89 44.577,0.89 46.609,0.89 48.641,0.89 50.673,0.89 52.705,0.89 54.737,0.89 56.769,0.89 58.801,0.89 60.833,0.89 62.865,0.89 64.897,0.89 66.929,0.89 6.985,2.922 9.017,2.922 11.049,2.922 13.081,2.922 29.337,2.922 31.369,2.922 33.401,2.922 35.433,2.922 37.465,2.922 39.497,2.922 41.529,2.922 43.561,2.922 45.593,2.922 47.625,2.922 49.657,2.922 51.689,2.922 53.721,2.922 55.753,2.922 67.945,2.922 69.977,2.922 72.009,2.922 74.041,2.922 1.905,4.954 3.937,4.954 5.969,4.954 14.097,4.954 20.193,4.954 24.257,4.954 26.289,4.954 28.321,4.954 30.353,4.954 32.385,4.954 34.417,4.954 36.449,4.954 38.481,4.954 40.513,4.954 42.545,4.954 44.577,4.954 46.609,4.954 48.641,4.954 50.673,4.954 52.705,4.954 54.737,4.954 68.961,4.954 70.993,4.954 73.025,4.954 75.057,4.954 77.089,4.954 2.921,6.986 4.953,6.986 6.985,6.986 13.081,6.986 15.113,6.986 21.209,6.986 23.241,6.986 27.305,6.986 29.337,6.986 31.369,6.986 33.401,6.986 35.433,6.986 37.465,6.986 39.497,6.986 41.529,6.986 43.561,6.986 45.593,6.986 47.625,6.986 49.657,6.986 51.689,6.986 53.721,6.986 55.753,6.986 57.785,6.986 59.817,6.986 61.849,6.986 63.881,6.986 65.913,6.986 67.945,6.986 69.977,6.986 72.009,6.986 74.041,6.986 76.073,6.986 78.105,6.986 80.137,6.986 1.905,9.018 3.937,9.018 5.969,9.018 14.097,9.018 20.193,9.018 22.225,9.018 70.993,9.018 73.025,9.018 75.057,9.018 77.089,9.018 79.121,9.018 83.185,9.018 2.921,11.05 4.953,11.05 6.985,11.05 15.113,11.05 17.145,11.05 21.209,11.05 33.401,11.05 35.433,11.05 37.465,11.05 39.497,11.05 41.529,11.05 43.561,11.05 45.593,11.05 47.625,11.05 49.657,11.05 51.689,11.05 53.721,11.05 55.753,11.05 57.785,11.05 59.817,11.05 61.849,11.05 63.881,11.05 65.913,11.05 67.945,11.05 72.009,11.05 74.041,11.05 76.073,11.05 78.105,11.05 84.201,11.05 1.905,13.082 3.937,13.082 5.969,13.082 16.129,13.082 26.289,13.082 32.385,13.082 34.417,13.082 36.449,13.082 38.481,13.082 40.513,13.082 42.545,13.082 44.577,13.082 46.609,13.082 48.641,13.082 50.673,13.082 52.705,13.082 54.737,13.082 56.769,13.082 58.801,13.082 60.833,13.082 62.865,13.082 64.897,13.082 66.929,13.082 68.961,13.082 70.993,13.082 75.057,13.082 77.089,13.082 79.121,13.082 81.153,13.082 83.185,13.082 85.217,13.082 4.953,15.114 6.985,15.114 9.017,15.114 21.209,15.114 29.337,15.114 31.369,15.114 33.401,15.114 35.433,15.114 37.465,15.114 39.497,15.114 41.529,15.114 43.561,15.114 45.593,15.114 47.625,15.114 67.945,15.114 69.977,15.114 72.009,15.114 76.073,15.114 78.105,15.114 80.137,15.114 82.169,15.114 84.201,15.114 86.233,15.114 88.265,15.114 22.225,17.146 24.257,17.146 28.321,17.146 30.353,17.146 32.385,17.146 34.417,17.146 36.449,17.146 38.481,17.146 40.513,17.146 42.545,17.146 73.025,17.146 75.057,17.146 79.121,17.146 81.153,17.146 83.185,17.146 85.217,17.146 87.249,17.146 89.281,17.146 6.985,19.178 9.017,19.178 11.049,19.178 13.081,19.178 17.145,19.178 19.177,19.178 23.241,19.178 25.273,19.178 29.337,19.178 31.369,19.178 33.401,19.178 35.433,19.178 37.465,19.178 39.497,19.178 41.529,19.178 74.041,19.178 76.073,19.178 80.137,19.178 82.169,19.178 84.201,19.178 86.233,19.178 88.265,19.178 1.905,21.21 5.969,21.21 8.001,21.21 10.033,21.21 18.161,21.21 20.193,21.21 32.385,21.21 34.417,21.21 36.449,21.21 38.481,21.21 77.089,21.21 79.121,21.21 83.185,21.21 85.217,21.21 87.249,21.21 89.281,21.21 17.59,23.114 18.293,23.15 4.953,23.242 6.985,23.242 9.017,23.242 23.241,23.242 31.369,23.242 33.401,23.242 35.433,23.242 37.465,23.242 86.233,23.242 88.265,23.242 90.297,23.242 17.148,23.662 18.615,23.776 16.153,24.658 15.655,25.156 1.905,25.274 3.937,25.274 5.969,25.274 8.001,25.274 10.033,25.274 12.065,25.274 32.385,25.274 34.417,25.274 36.449,25.274 2.921,27.306 4.953,27.306 6.985,27.306 9.017,27.306 11.049,27.306 13.081,27.306 37.465,27.306 78.105,27.306 80.137,27.306 82.169,27.306 15.023,28.463 16.219,28.759 15.023,29.167 1.905,29.338 3.937,29.338 5.969,29.338 8.001,29.338 10.033,29.338 28.321,29.338 79.121,29.338 87.249,29.338 89.281,29.338 91.313,29.338 16.219,29.463 14.69,29.787 16.69,29.986 14.396,30.427 16.862,30.669 14.494,31.124 16.708,31.356 2.921,31.37 4.953,31.37 6.985,31.37 9.017,31.37 27.305,31.37 29.337,31.37 80.137,31.37 82.169,31.37 84.201,31.37 88.265,31.37 90.297,31.37 14.956,31.655 17.205,31.854 15.6,31.94 17.703,32.352 16.097,32.438 18.201,32.849 16.595,32.936 18.699,33.347 1.905,33.402 3.937,33.402 5.969,33.402 8.001,33.402 10.033,33.402 12.065,33.402 14.097,33.402 26.289,33.402 28.321,33.402 30.353,33.402 36.449,33.402 17.093,33.434 19.197,33.845 17.591,33.932 19.694,34.343 18.089,34.429 20.192,34.841 18.586,34.927 20.69,35.338 2.921,35.434 4.953,35.434 6.985,35.434 9.017,35.434 11.049,35.434 13.081,35.434 15.113,35.434 19.084,35.425 23.241,35.434 25.273,35.434 27.305,35.434 29.337,35.434 31.369,35.434 33.401,35.434 35.433,35.434 37.465,35.434 21.188,35.836 19.582,35.923 21.686,36.334 20.08,36.421 22.183,36.832 20.578,36.918 22.681,37.33 21.075,37.416 1.905,37.466 3.937,37.466 5.969,37.466 8.001,37.466 10.033,37.466 12.065,37.466 14.097,37.466 16.129,37.466 18.161,37.466 26.289,37.466 28.321,37.466 30.353,37.466 32.385,37.466 34.417,37.466 36.449,37.466 38.481,37.466 77.089,37.466 79.121,37.466 81.153,37.466 83.185,37.466 85.217,37.466 87.249,37.466 89.281,37.466 91.313,37.466 23.179,37.827 21.573,37.914 23.677,38.325 22.071,38.412 22.569,38.91 24.076,38.905 2.921,39.498 4.953,39.498 6.985,39.498 9.017,39.498 11.049,39.498 13.081,39.498 15.113,39.498 17.145,39.498 27.305,39.498 29.337,39.498 31.369,39.498 33.401,39.498 35.433,39.498 37.465,39.498 39.497,39.498 76.073,39.498 78.105,39.498 80.137,39.498 82.169,39.498 84.201,39.498 86.233,39.498 88.265,39.498 90.297,39.498 24.093,39.609 24.093,40.313 24.093,41.017 1.905,41.53 3.937,41.53 5.969,41.53 8.001,41.53 12.065,41.53 14.097,41.53 16.129,41.53 26.289,41.53 28.321,41.53 30.353,41.53 32.385,41.53 34.417,41.53 36.449,41.53 38.481,41.53 40.513,41.53 73.025,41.53 75.057,41.53 77.089,41.53 79.121,41.53 81.153,41.53 83.185,41.53 85.217,41.53 87.249,41.53 89.281,41.53 24.093,41.721 22.897,42.349 24.093,42.425 22.897,43.053 24.093,43.129 2.921,43.562 4.953,43.562 6.985,43.562 29.337,43.562 31.369,43.562 33.401,43.562 35.433,43.562 37.465,43.562 39.497,43.562 41.529,43.562 43.561,43.562 72.009,43.562 74.041,43.562 76.073,43.562 78.105,43.562 80.137,43.562 82.169,43.562 84.201,43.562 86.233,43.562 88.265,43.562 24.093,43.833 13.665,44.351 12.962,44.379 14.352,44.503 24.093,44.537 12.613,44.99 10.348,45.032 9.644,45.049 10.952,45.393 9.067,45.453 1.905,45.594 3.937,45.594 5.969,45.594 30.353,45.594 32.385,45.594 34.417,45.594 36.449,45.594 38.481,45.594 40.513,45.594 42.545,45.594 44.577,45.594 46.609,45.594 48.641,45.594 50.673,45.594 52.705,45.594 54.737,45.594 56.769,45.594 58.801,45.594 60.833,45.594 62.865,45.594 64.897,45.594 66.929,45.594 68.961,45.594 70.993,45.594 73.025,45.594 75.057,45.594 77.089,45.594 79.121,45.594 81.153,45.594 83.185,45.594 85.217,45.594 87.249,45.594 11.615,45.63 12.319,45.63 8.8,46.105 20.785,46.442 8.929,46.797 11.343,46.827 12.047,46.827 20.29,46.942 10.765,47.228 12.613,47.246 9.419,47.302 10.103,47.469 20.049,47.603 2.921,47.626 4.953,47.626 6.985,47.626 17.145,47.626 31.369,47.626 33.401,47.626 35.433,47.626 37.465,47.626 39.497,47.626 41.529,47.626 43.561,47.626 45.593,47.626 47.625,47.626 49.657,47.626 51.689,47.626 53.721,47.626 55.753,47.626 57.785,47.626 59.817,47.626 61.849,47.626 63.881,47.626 65.913,47.626 67.945,47.626 69.977,47.626 72.009,47.626 74.041,47.626 76.073,47.626 78.105,47.626 80.137,47.626 82.169,47.626 84.201,47.626 86.233,47.626 21.402,47.749 1.905,49.658 3.937,49.658 5.969,49.658 8.001,49.658 10.033,49.658 18.161,49.658 28.321,49.658 30.353,49.658 32.385,49.658 34.417,49.658 36.449,49.658 38.481,49.658 40.513,49.658 42.545,49.658 44.577,49.658 46.609,49.658 48.641,49.658 50.673,49.658 52.705,49.658 54.737,49.658 60.833,49.658 62.865,49.658 64.897,49.658 66.929,49.658 68.961,49.658 70.993,49.658 73.025,49.658 75.057,49.658 77.089,49.658 83.185,49.658 20.103,51.101 21.299,51.254 2.921,51.69 4.953,51.69 6.985,51.69 9.017,51.69 11.049,51.69 13.081,51.69 15.113,51.69 23.241,51.69 25.273,51.69 27.305,51.69 29.337,51.69 31.369,51.69 33.401,51.69 35.433,51.69 37.465,51.69 39.497,51.69 41.529,51.69 43.561,51.69 45.593,51.69 47.625,51.69 49.657,51.69 51.689,51.69 65.913,51.69 67.945,51.69 69.977,51.69 72.009,51.69 74.041,51.69 76.073,51.69 78.105,51.69 82.169,51.69 21.173,53.276 20.298,53.313 1.905,53.722 3.937,53.722 5.969,53.722 8.001,53.722 10.033,53.722 12.065,53.722 14.097,53.722 24.257,53.722 26.289,53.722 28.321,53.722 30.353,53.722 32.385,53.722 34.417,53.722 36.449,53.722 38.481,53.722 40.513,53.722 42.545,53.722 44.577,53.722 46.609,53.722 48.641,53.722 50.673,53.722 52.705,53.722 54.737,53.722 66.929,53.722 68.961,53.722 70.993,53.722 73.025,53.722 75.057,53.722 77.089,53.722 79.121,53.722 4.953,55.754 6.985,55.754 9.017,55.754 11.049,55.754 13.081,55.754 15.113,55.754 17.145,55.754 19.177,55.754 21.209,55.754 23.241,55.754 25.273,55.754 27.305,55.754 29.337,55.754 49.657,55.754 51.689,55.754 53.721,55.754 55.753,55.754 57.785,55.754 59.817,55.754 61.849,55.754 63.881,55.754 65.913,55.754 67.945,55.754 69.977,55.754 72.009,55.754 74.041,55.754 76.073,55.754 5.969,57.786 8.001,57.786 10.033,57.786 12.065,57.786 14.097,57.786 16.129,57.786 18.161,57.786 20.193,57.786 22.225,57.786 24.257,57.786 26.289,57.786 28.321,57.786 30.353,57.786 32.385,57.786 34.417,57.786 36.449,57.786 38.481,57.786 40.513,57.786 42.545,57.786 44.577,57.786 46.609,57.786 48.641,57.786 50.673,57.786 52.705,57.786 54.737,57.786 56.769,57.786 58.801,57.786 60.833,57.786 62.865,57.786 64.897,57.786 66.929,57.786 68.961,57.786 70.993,57.786
  other v2: 20.066,26.417 24.257,26.417 21.463,26.544 22.86,26.544 18.669,27.052 25.781,27.052 18.669,28.068 25.781,28.068 18.669,29.084 25.781,29.084 19.304,29.846 20.447,29.846 21.463,29.846 22.987,29.846 24.13,29.846 25.146,29.846 20.193,30.862 24.257,30.862 22.225,31.116 20.193,32.005 22.225,32.005 24.257,32.005 22.225,32.894
GPIO_PA4: P3.1 U2.20 | length 18.2
  Top Layer w0.203: U2.20 15.899,21.301 16.062,21.464 v2(16.129,21.464)
  Bottom Layer w0.203: P3.1 6.731,18.035 12.7,18.035 v2(16.129,21.464)
GPIO_PA5: P3.2 U2.21 | length 17.1
  Top Layer w0.203: U2.21 14.963,20.813 16.12,20.813 v2(16.132,20.825)
  Bottom Layer w0.203: P3.2 4.572,17.654 12.954,17.654 16.126,20.825 v2(16.132,20.825)
GPIO_PA6: P3.3 U2.22 | length 16.2
  Top Layer w0.203: U2.22 15.955,20.301 16.065,20.19 v2(16.132,20.19)
  Bottom Layer w0.203: P3.3 13.202,17.273 16.119,20.19 v2(16.132,20.19)
GPIO_PA7: P3.4 U2.23 | length 17
  Top Layer w0.203: U2.23 15.853,19.801 16.095,19.559 v2(16.129,19.559)
  Bottom Layer w0.203: P3.4 4.572,16.892 13.462,16.892 v2(16.129,19.559)
MIC_Input: C2.1 P1.2 R4.1 | length 5.2
  Top Layer w0.203: P1.2 13.488,46.229 13.551,46.165 ; C2.1 13.551,46.165 ; R4.1 13.551,46.165
NetC1_1: C1.1 R1.1 R4.2 | length 3.3
  Top Layer w0.203: R4.2 C1.1 16.726,48.642 R1.1
NetC2_2: C2.2 R5.1 | length 1.6
  Top Layer w0.203: C2.2 16.726,45.34 R5.1
NetC3_2: C3.2 R6.1 | length 1.6
  Top Layer w0.203: C3.2 22.009,39.879 R6.1
NetC4_1: C4.1 R7.1 R8.1 R9.2 | length 4.9
  Top Layer w0.203: R7.1 R9.2 25.87,47.346 C4.1 ; C4.1@25.87,47.397 R8.1
NetR14_2: R14.2 U3.3 | length 4.9
  Top Layer w0.254: R14.2@56.858,2.083 57.658,2.883 57.658,5.352 57.92,5.614 U3.3@58.787,5.614
  Top Layer w0.508: R14.2 R14.2@56.858,2.083 ; U3.3@58.787,5.614 U3.3
NetR15_2: R15.2 U4.3 | length 4.9
  Top Layer w0.254: R15.2@56.858,49.962 57.658,50.762 57.658,53.214 57.937,53.493 U4.3@58.787,53.493
  Top Layer w0.508: R15.2 R15.2@56.858,49.962 ; U4.3@58.787,53.493 U4.3
NRST: C7.1 P2.5 U2.7 | length 25.6
  Top Layer w0.203: P2.5 C7.1 ; U2.7 21.457,24.795 21.457,23.756 v2(21.463,23.75)
  Bottom Layer w0.203: 18.542,4.7 18.542,14.987 21.463,17.908 v2(21.463,23.75)
OSC_IN: C5.1 U2.5 X1.1 | length 8.5
  Top Layer w0.229: U2.5 22.413,24.839 22.413,25.573 22.392,25.594 22.392,27.039 22.391,27.969 22.525,28.103 ; C5.1 22.997,30.604 22.525,30.604 22.391,30.471 22.391,29.431 22.391,28.236 22.525,28.103 ; X1.1 22.525,28.103
OSC_OUT: C6.1 U2.6 X1.2 | length 8.5
  Top Layer w0.229: X1.2 21.876,28.103 ; C6.1 21.404,30.604 21.876,30.604 22.01,30.471 22.01,29.273 22.01,28.236 21.876,28.103 ; U2.6 21.989,24.839 21.989,25.573 22.011,25.594 22.011,26.881 22.01,27.969 21.876,28.103
SWCLK: P2.2 U2.49 | length 13.6
  Top Layer w0.203: v2(25.4,15.241) 25.43,15.271 26.421,15.271 U2.49
  Bottom Layer w0.203: P2.2 24.511,4.446 25.4,5.335 v2(25.4,15.241)
SWDIO: P2.4 U2.46 | length 16.5
  Top Layer w0.203: v2(19.812,14.606) 23.114,14.606 23.451,14.269 U2.46@23.451,13.301
  Bottom Layer w0.203: P2.4 19.431,14.225 v2(19.812,14.606)
SWO: P2.6 U2.55 | length 23.7
  Top Layer w0.203: v2(20.574,18.289) 20.58,18.295 U2.55@26.445,18.295
  Bottom Layer w0.203: P2.6 17.653,6.351 17.653,15.368 v2(20.574,18.289)
USB_N: D1.1 J1.A7 J1.B7 U2.45 | length 82.2
  Top Layer w0.188: J1.A7 86.34,30.82 86.91,30.82 87.095,30.635 87.095,30.073 86.914,29.891 J1.B7@86.34,29.891
  Top Layer w0.189: U2.45 22.907,13.257 22.907,12.421 22.86,12.374 22.86,10.923 24.384,9.399 68.769,9.399 80.864,21.494 80.864,25.401 ; D1.1 80.803,25.462 80.864,25.401 ; v2(83.048,29.846) 83.048,29.647 80.864,27.463 80.864,25.401 ; v2(84.262,29.782) 84.332,29.782 84.478,29.928 85.713,29.928 85.73,29.911 86.248,29.911 J1.B7
  Bottom Layer w0.189: v2(83.048,29.846) 83.072,29.822 84.223,29.822 v2(84.262,29.782)
USB_P: D1.6 J1.A6 J1.B6 U2.44 | length 82.3
  Top Layer w0.188: 85.725,30.354 85.513,30.566 85.513,31.158 85.675,31.32 86.268,31.32 J1.B6
  Top Layer w0.189: U2.44 22.451,10.885 24.253,9.083 68.899,9.083 81.18,21.363 81.18,25.401 ; D1.6 81.241,25.462 81.18,25.401 ; J1.A6 86.248,30.3 85.623,30.3 85.569,30.245 84.093,30.245 81.18,27.332 81.18,25.401
VCAP: C19.1 U2.30 | length 2
  Top Layer w0.203: C19.1 13.456,16.301 U2.30
VCC: C8.1 C9.1 C10.1 D1.4 J1.A4_B9 J1.B4_A9 R14.1 R15.1 U3.1 U4.1 | length 37.1
  Top Layer w0.254: D1.4@82.461,23.608 v1@83.678,23.608
  Top Layer w0.508: R14.1 59.385,2.033 60.49,3.138 ; R15.1 59.436,49.912 60.621,51.097 ; U3.1 59.878,3.75 60.49,3.138 ; U4.1 59.878,51.629 60.41,51.097 60.621,51.097 ; v3(63.119,50.928) 61.43,50.928 C8.1 61.261,51.097 60.621,51.097 ; C10.1 C9.1 60.49,3.138 ; C10.1@63.335,3.049 v3(65.024,3.049) ; D1.4 D1.4@82.461,23.608
  Top Layer w0.559: v3(83.185,33.783) 83.962,33.006 J1.B4_A9 ; v3(83.312,27.433) 83.504,27.433 84.277,28.206 J1.A4_B9
  Inner Layer Bottom w0.508: 61.849,50.801 61.976,50.928 v3(63.119,50.928) 64.389,50.928 64.516,50.801 ; 63.627,2.922 63.754,3.049 v3(65.024,3.049) 66.548,3.049 66.675,2.922
  Inner Layer Bottom w0.559: 81.915,35.053 v3(83.185,33.783) 84.455,32.513 84.582,32.513 ; 82.296,25.909 82.296,26.365 83.312,27.381 v3(83.312,27.433) 84.201,28.322 84.201,28.449
  other v1: 83.693,23.623
VDD: C13.1 C14.1 C15.1 C16.1 C17.1 C18.1 P2.1 R13.1 R16.1 U2.1 U2.19 U2.32 U2.48 U2.64 U3.5 | length 32.6
  Top Layer w0.254: R13.1 9.067,10.326 9.868,11.127 9.868,11.393 v1(9.906,11.431) 9.944,11.393 9.944,11.001 10.619,10.326 R16.1 ; v1(11.944,20.696) C16.1@13.049,20.696 ; v1(13.087,13.838) 13.087,14.955 C17.1 13.433,15.301 U2.32 ; C16.1@13.131,20.664 14.243,21.775 14.926,21.775 U2.19 ; U2.48 24.451,12.856 24.476,12.831 24.723,12.831 26.073,11.481 C13.1 ; U2.1 24.451,24.956 24.476,24.982 C15.1 28.371,24.982 29.185,24.168 29.553,24.168 v1(29.591,24.131) 29.553,24.093 29.058,24.093 28.371,23.407 C14.1 28.271,23.407 27.665,22.801 U2.64 ; v1(26.168,10.282) C13.1@26.168,11.336 ; C15.1@28.233,25.02 C15.1@28.333,25.02 ; C18.1@30.696,13.12 C18.1 ; v3(54.61,3.684) v3@54.643,3.717 ; U3.5@56.46,3.717 U3.5
  Top Layer w0.406: v3(29.21,13.12) C18.1@30.696,13.12
  Top Layer w0.508: v3@54.643,3.717 U3.5@56.46,3.717
  Inner Layer Bottom w0.254: 27.813,13.082 27.851,13.12 ; 30.645,13.12 30.734,13.209 ; 52.959,3.557 53.086,3.684
  Inner Layer Bottom w0.508: 27.851,13.12 v3(29.21,13.12) 30.645,13.12 ; 53.086,3.684 v3(54.61,3.684) 56.388,3.684
pads on no net: D1.3 J1. J1.A8 J1.B8 U2.2 U2.3 U2.4 U2.8 U2.9 U2.10 U2.11 U2.15 U2.16 U2.17 U2.24 U2.25 U2.26 U2.27 U2.29 U2.33 U2.34 U2.35 U2.36 U2.37 U2.38 U2.39 U2.40 U2.41 U2.42 U2.43 U2.50 U2.51 U2.52 U2.53 U2.54 U2.56 U2.57 U2.58 U2.59 U2.61 U2.62 U3.4 U4.4

## Polygon pours and split planes (outlines as drawn)
VCC on Inner Layer Bottom "VCC_L03_P010" (solid, pour order 10): 57.669,59.945 57.727,59.887 57.727,-0.068 75.369,-0.068 93.218,17.781 93.218,43.181 76.454,59.945
VDD on Inner Layer Bottom "VDD_L03_P008" (solid, pour order 8): 0,29.973 8.636,29.973 16.764,21.845 18.542,21.845 19.558,22.861 19.558,24.639 17.653,26.544 17.653,30.227 21.463,34.037 24.257,34.037 28.324,29.97 42.727,29.97 57.727,14.97 57.727,-0.068 0.069,-0.068 0,0.001
AVDD on Inner Layer Bottom "AVDD_L03_P009" (solid, pour order 9): 0,29.973 0,59.945 57.669,59.945 57.727,59.887 57.727,44.97 52.716,44.97 37.716,29.97 28.324,29.97 24.257,34.037 21.463,34.037 17.653,30.227 17.653,26.544 19.558,24.639 19.558,22.861 18.542,21.845 16.764,21.845 8.636,29.973
GND on Bottom Layer "GND_BOT" (solid, pour order 1): -7.239,0.001 -7.239,59.945 62.738,59.945 cw(c62.738,29.97) 62.738,-0.006 62.738,0.001
GND on Top Layer "GND_TOP" (solid, pour order 5): 0,0 0,59.945 62.738,59.945 cw(c62.738,29.97) 62.738,-0.006
GND on Inner Layer Top "GND_PLANE" (solid, pour order 6): 0,0.001 0,59.945 62.738,59.945 cw(c62.738,29.97) 62.738,-0.006

## Other copper
Top Layer:
  pour cut-out: 18.96,25.819 18.071,26.708 18.071,26.707 cw(c18.161,26.798) 18.034,26.798 18.034,29.592 cw(c18.161,29.592) 18.071,29.682 19.558,31.168 19.558,32.64 cw(c19.685,32.64) 19.595,32.73 20.484,33.619 20.484,33.618 cw(c20.574,33.529) 20.574,33.656 23.876,33.656 cw(c23.876,33.529) 23.967,33.618 23.966,33.619 24.855,32.73 cw(c24.765,32.64) 24.892,32.64 24.892,31.168 26.379,29.682 cw(c26.289,29.592) 26.416,29.592 26.416,26.798 cw(c26.289,26.798) 26.379,26.707 26.379,26.708 25.49,25.819 25.491,25.819 cw(c25.4,25.909) 25.4,25.781 23.675,25.781 23.077,25.184 cw(c22.987,25.274) 22.897,25.364 23.532,25.999 23.532,25.998 cw(c23.622,25.909) 23.622,26.036 25.347,26.036 26.162,26.85 26.162,29.539 24.675,31.026 24.675,31.025 cw(c24.765,31.116) 24.638,31.116 24.638,32.587 23.823,33.401 20.627,33.401 19.812,32.587 19.812,31.116 cw(c19.685,31.116) 19.775,31.025 19.775,31.026 18.288,29.539 18.288,26.85 19.103,26.036 20.828,26.036 cw(c20.828,25.909) 20.955,25.909 cw(c20.828,25.909) 20.828,25.781 19.05,25.781 cw(c19.05,25.909)
  text "github.com/Vaarai" at 30.099,55.246 h1.52

## Silkscreen, mask and mechanical layers (free items; w line width, h text height)
Top Overlay:
  text "B1" at 8.636,11.177 h1.02
  text "B0" at 10.16,11.188 h1.02
  text "on" at 6.858,9.282 h1.02
  text "off" at 6.858,6.107 h1.02
Bottom Overlay:
  text "PA4" at 4.572,23.115 h1.52 r180
  text "PA5" at 4.572,20.575 h1.52 r180
  text "PA6" at 4.699,18.035 h1.52 r180
  text "PA7" at 4.699,15.495 h1.52 r180
  text "SWO" at 13.589,4.573 h1.52 r270
  text "NRST" at 16.129,4.573 h1.52 r270
  text "SWDIO" at 18.669,4.573 h1.52 r270
  text "GND" at 21.209,4.573 h1.52 r270
  text "SWDCLK" at 23.749,4.573 h1.52 r270
  text "VDD" at 26.289,4.573 h1.52 r270
Mechanical 1:
  pour cut-out: 16.891,24.13 cw(c16.891,24.258) 16.891,24.385 24.511,24.385 cw(c24.511,24.258) 24.638,24.258 cw(c24.511,24.258) 24.511,24.13
  lines w0.254: 52.716,14.97 cw(c52.716,29.97) 52.716,44.97 62.716,44.97 ; 52.738,14.97 62.738,14.97 ccw(c62.738,29.97) 62.738,44.97 ; 62.738,-0.006 ccw(c62.738,29.97) 62.738,59.945 0,59.945 0,0.001 62.738,0.001
Mechanical 13:
  lines w0.254: 0,29.973 8.636,29.973 16.764,21.845 18.542,21.845 19.558,22.861 19.558,24.639 17.653,26.544 17.653,31.37 20.32,34.037 24.257,34.037 28.324,29.97 37.716,29.97 ; 20.828,25.909 19.05,25.909 18.161,26.798 18.161,29.592 19.685,31.116 19.685,32.64 20.574,33.529 23.876,33.529 24.765,32.64 24.765,31.116 26.289,29.592 26.289,26.798 25.4,25.909 23.622,25.909 22.987,25.274 ; 57.727,-0.068 57.727,14.97 ; 57.727,44.97 57.727,59.887

## Text inside footprints (layer, text, board x,y; h text height)
J1: Mechanical 13 "PCB EDGE" at 93.559,36.006 h1.02 r90
U1: Top Overlay "*" at 19.025,43.955 h1.02 r90; Mechanical 13 "*" at 20.18,45.048 h1.02 r90; Mechanical 7 "0.158in/4.013mm" at 16.421,44.609 h1.02 r90; Mechanical 7 "0.244in/6.198mm" at 14.516,44.609 h1.02 r90; Mechanical 7 "0.197in/5.004mm" at 21.654,52.045 h1.02 r90; Mechanical 7 "0.05in/1.27mm" at 20.384,37.351 h1.02 r90; Mechanical 7 "0.05in/1.27mm" at 26.886,42.463 h1.02 r90
U2: Mechanical 7 "0.394in/10.008mm" at 20.384,33.081 h1.02 r270; Mechanical 7 "0.02in/0.5mm" at 23.884,30.859 h1.02 r270